# EAGLE board IOB-Adapter-Generic (EAGLE 7.7.0)
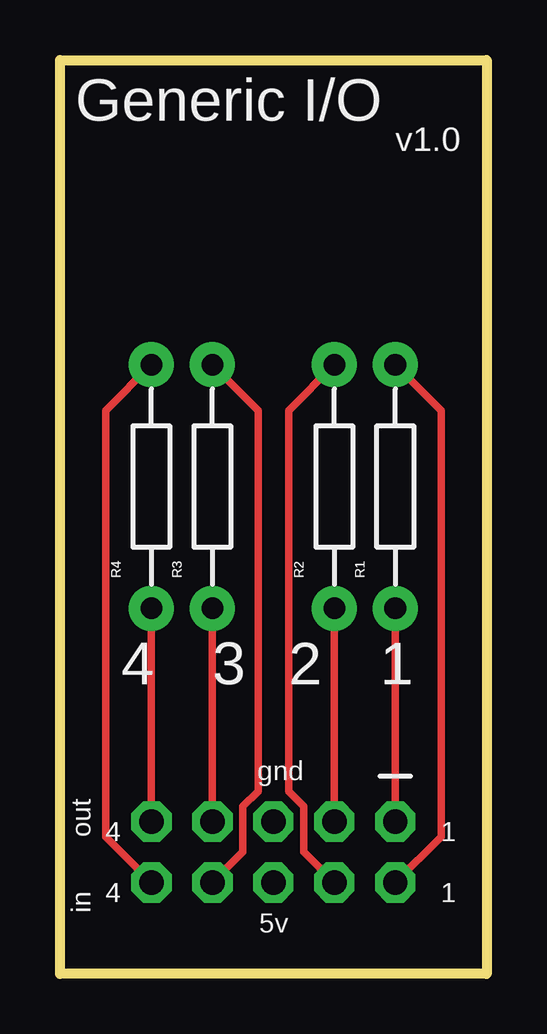
[diagram p0: board, top side]
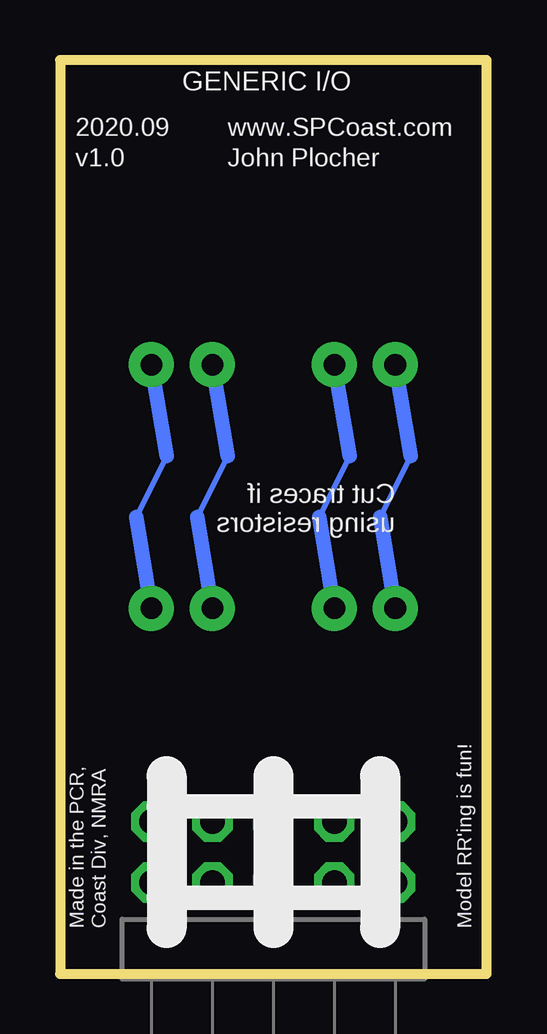
[diagram p1: board, bottom side, seen from below]

Size 17.78 x 38.1 mm. Coordinates in mm from the lower left corner, seen from the top.
Outline: 0,38.1 17.78,38.1 17.78,0 0,0 0,38.1
Copper layers (1*16): Top 0.035mm / dielectric 1.5mm / Bottom 0.035mm
Design rules "default": minimum track width 10mil, minimum drill 0.6mm, track to track 8mil, track to pad 8mil, pad to pad 8mil, via to via 8mil, smd to smd 8mil, copper to edge 40mil, drill to drill 8mil, minimum pad ring 10mil, minimum via ring 8mil, stop-mask expansion 4mil, vias tented up to drill 0mil, thermal gap 10mil
Net classes: 0 default: width 0.254 mm, drill 0.4 mm, clearance 0.127 mm; 1 Power: width 0.254 mm, drill 0.4 mm, clearance 0.127 mm; 2 signals: width 0.254 mm, drill 0.4 mm, clearance 0.127 mm

## Footprints (pad centres in the part's own frame; a part is rotated, then mirrored left to right if it is on the bottom)
IOB-V3-MODULE = drill 1.016 pad 1.676 octagon: 1 -1.27,-5.08; 2 1.27,-5.08; 3 -1.27,-2.54; 4 1.27,-2.54; 5 -1.27,0; 6 1.27,0; 7 -1.27,2.54; 8 1.27,2.54; 9 -1.27,5.08; 10 1.27,5.08
CUT-R = drill 0.9 pad 1.88: P1 5.08,0; P2 -5.08,0

## Placement (x,y rotation side)
JP1  CONNECTOR-M05X2  [IOB-V3-MODULE]  8.89,5.08 270 bottom
R1  NOSTUFF  [CUT-R]  13.97,20.32 90 top
R2  NOSTUFF  [CUT-R]  11.43,20.32 90 top
R3  NOSTUFF  [CUT-R]  6.35,20.32 90 top
R4  NOSTUFF  [CUT-R]  3.81,20.32 90 top

## Library data of the parts
JP1 R1-R4 = SPCoast

## Nets
GND [Power]: JP1.5
N$1: JP1.1 R1.P2
N$2: JP1.3 R2.P2
N$3: JP1.7 R3.P2
N$4: JP1.9 R4.P2
P1 [signals]: JP1.2 R1.P1
P2 [signals]: JP1.4 R2.P1
P3 [signals]: JP1.8 R3.P1
P4 [signals]: JP1.10 R4.P1
VCC [Power]: JP1.6

## Tracks (layer width: path | path; a pad name or v marks a point on that pad's centre or on a via)
N$1
  Top 0.305: JP1.1 R1.P2
N$2
  Top 0.305: JP1.3 R2.P2
N$3
  Top 0.305: JP1.7 R3.P2
N$4
  Top 0.305: JP1.9 R4.P2
P1
  Top 0.305: JP1.2 15.88,5.71 15.88,23.5 R1.P1
P2
  Top 0.305: JP1.4 10.16,5.08 10.16,6.99 9.53,7.62 9.53,23.5 R2.P1
P3
  Top 0.305: JP1.8 7.62,5.08 7.62,6.99 8.26,7.62 8.26,23.5 R3.P1
P4
  Top 0.305: JP1.10 1.91,5.71 1.91,23.5 R4.P1

## Text on the board
tPlace: Generic I/O | v1.0 | 4 | 3 | 2 | 1
bPlace: GENERIC I/O | www.SPCoast.com | 2020.09 | John Plocher | v1.0 | Cut traces if / using resistors | Model RR'ing is fun! | Made in the PCR, / Coast Div, NMRA
Document: Yellow
_tNames: R4 | R3 | R2 | R1
_Name: JP1